# Altium PCB MIC24085 Breakout.PcbDoc
Units mil, origin at the board's own origin, x right, y up, seen from the top; angles counter-clockwise.
Board outline 1765 x 625 mil, 2 copper layers (Top Layer, Bottom Layer); 15 components, 8 nets, 45 pads, 36 vias.
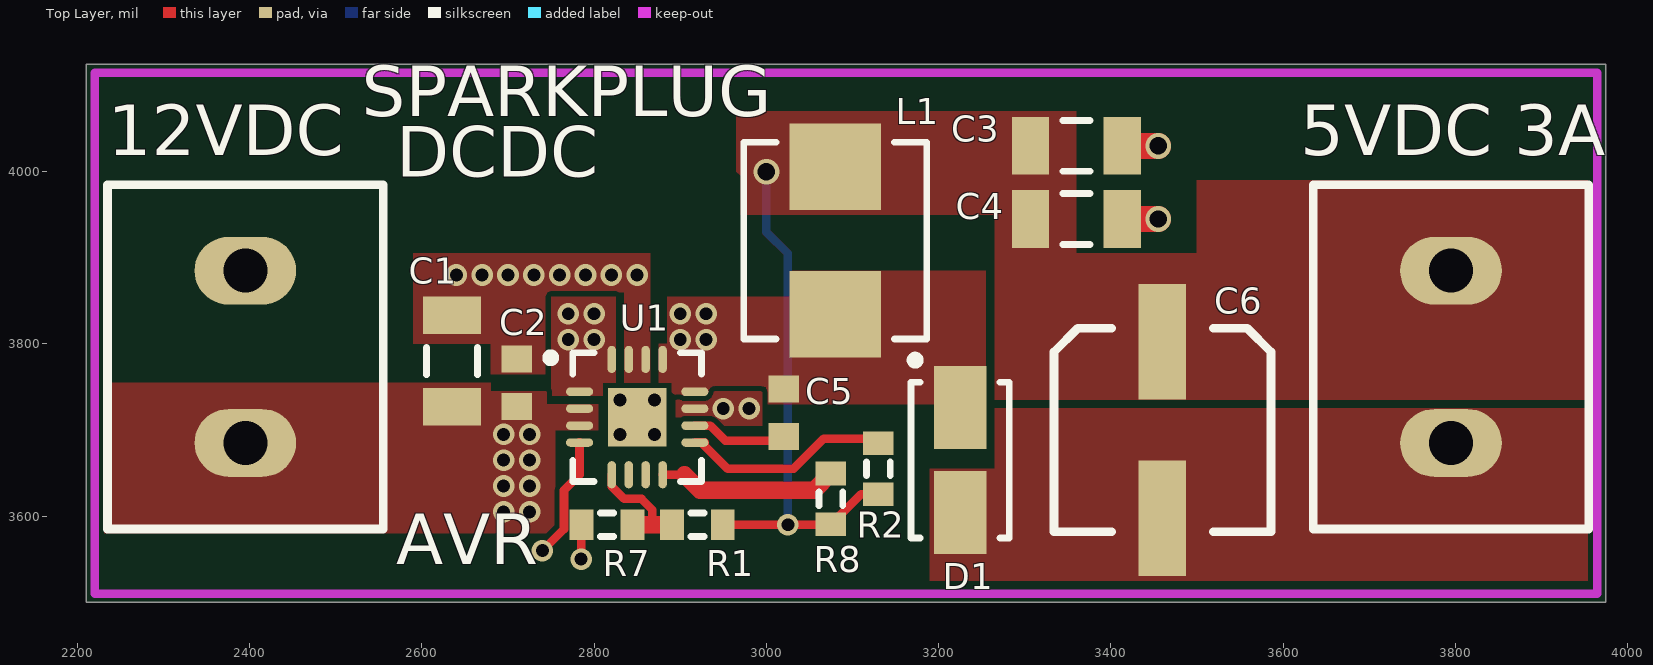
[diagram p0: Top Layer view]
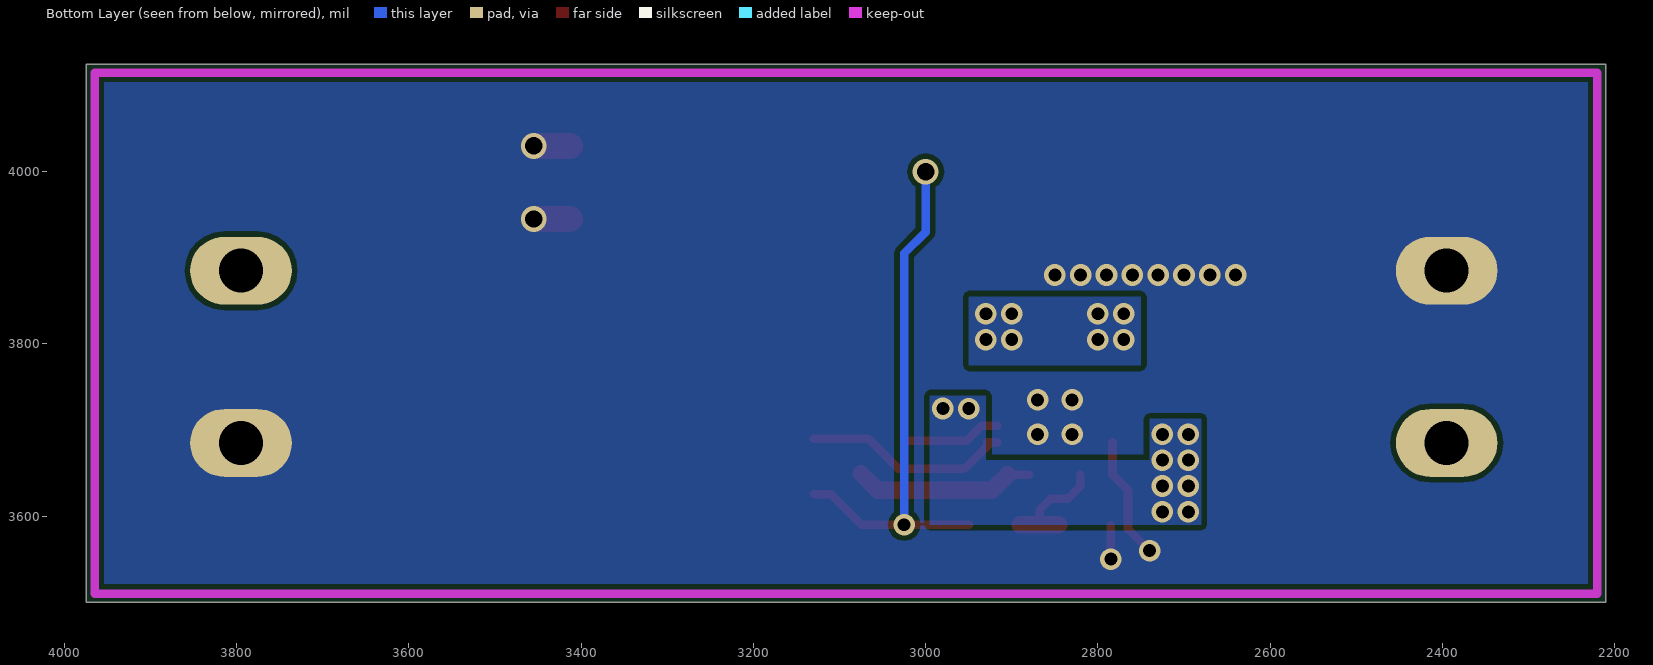
[diagram p1: Bottom Layer view, seen from below]

## Layer stack, top to bottom
Top Layer: signal copper 1.4
Dielectric: dielectric 12.6, FR-4, Dk 4.8
Bottom Layer: signal copper 1.4

## Board outline
2210,3500 2210,4125 3975,4125 3975,3500

## Design rules (kind name [scope] priority, off if disabled: settings)
Clearance [All] p1: gap=6
ComponentClearance [All] p1: gap=0 collisioncheckmode=3 verticalgap=10 showdistances=FALSE
FanoutControl Fanout_SOIC [(InComponent('U8') AND InComponent('U7'))] p3: bgadir=Out bgaviamode=Centered fanoutstyle=Staggered fanoutdirection=Alternating viagrid=1 // Fanout_SOIC (Default Rule)
FanoutControl Fanout_Small [All] p4: bgadir=Out bgaviamode=Centered fanoutstyle=Auto fanoutdirection=Alternating viagrid=1 // Fanout_Small (Default Rule)
HoleSize [All] p1: absolutevalues=TRUE maxlimit=120 minlimit=1 maxpercent=80.000 minpercent=20.000
MinimumSolderMaskSliver [All] p1 off: minsoldermaskwidth=10
MinimumSolderMaskSliver SilkscreenOverComponentPads [All] p2 off: minsoldermaskwidth=10
PlaneConnect [All] p1: planeconnectstyle=Direct reliefexpansion=20 reliefentries=4 reliefconductorwidth=10 reliefairgap=10
PolygonConnect PGND [InNet('GND')] p1: connectstyle=Direct reliefconductorwidth=10 reliefentries=4 polygonreliefangle="90 Angle" airgapwidth=10
PolygonConnect PolygonConnect_3 [InNet('5VCC')] p2: connectstyle=Direct reliefconductorwidth=10 reliefentries=4 polygonreliefangle="90 Angle" airgapwidth=10
PolygonConnect PolygonConnect_2 [InNet('SW')] p3: connectstyle=Direct reliefconductorwidth=10 reliefentries=4 polygonreliefangle="90 Angle" airgapwidth=10
PolygonConnect PolygonConnect_1 [InNet('VIN')] p4: connectstyle=Direct reliefconductorwidth=10 reliefentries=4 polygonreliefangle="90 Angle" airgapwidth=10
PolygonConnect [All] p5: connectstyle=Relief reliefconductorwidth=10 reliefentries=4 polygonreliefangle="90 Angle" airgapwidth=10
RoutingVias [All] p1: holewidth=15 width=25 viastyle="Through Hole" minholewidth=15 minwidth=25 maxholewidth=28 maxwidth=50
SilkToSilkClearance [All] p1 off: silktosilkclearance=10
SolderMaskExpansion [All] p1: expansion=4
Width [All] p1: maxlimit=30 minlimit=6 preferedwidth=6 minimp=50.000000 maximp=50.000000 favimp=50.000000
21 further rules are at their usual default settings.

## Components (designator, comment, footprint, x,y, rotation, side; value= is the part's Value field where it differs from the comment)
"5VDC 3A" "Pheonix Contact" CON-PHEONIX-508-Alt 3795,3885 r270 top (schematic designator "5v Out")
12VDC "Pheonix Contact" CON-PHEONIX-508-Alt 2395,3685 r90 top (schematic designator "12v Input")
C1 "1206" C1206 2635,3780 r270 top
C2 "0603" 1608[0603] 2710,3755 r270 top
C3 "1206" C1206 3360,4030 r180 top
C4 "1206" C1206 3360,3945 r180 top
C5 "0603" 1608[0603] 3020,3720 r90 top
C6 "VS D" "Panasonic VS D" 3460,3700 r90 top
D1 "PMEG1030EH_EJ" "SK33A - SOD123" 3225,3665 r90 top
L1 "CIP0530LR3R3" CIP0530LR3R3 3080,3920 r90 top
R1 "0603" J1-0603 2920,3590 r0 top
R2 "0603" J1-0603 3130,3655 r90 top
R7 "0603" J1-0603 2815,3590 r0 top
R8 "0603" J1-0603 3075,3620 r90 top
U1 "MIC24085" MIC24085-AYML 2850,3715 r0 top

## Footprints (in the part's own frame and the unit in brackets; to place one, negate y for a bottom-side part, rotate by r counter-clockwise, add the part's x,y. Pads: shape width x height; smd on the part's side, far side on the other; paste and mask are expansions set on the pad)
1608[0603] [mm] "Chip Capacitor, Body 1.6x0.8mm, IPC High Density"
  rect 0.8x0.9 smd: 1(-0.7,0) 2(0.7,0)
  body extent -0.87,-0.48 0.87,0.48, height 1.3
C1206 [mm] "Chip Capacitor, Body 3.2x1.6mm, IPC High Density"
  rect 1.1x1.7 smd: 1(-1.35,0) 2(1.35,0)
  silkscreen extent -0.4,-0.75 0.4,0.75, body extent -1.7,-0.9 1.7,0.9, height 1.3
CIP0530LR3R3 [mm] "Precision Wire Wound Inductor, 2-Leads, Body 5.58x5.30mm, IPC Medium Density"
  rect 2.55x2.7 smd: 1(-2.175,0) 2(2.175,0)
  silkscreen extent -2.9,-2.7 2.9,2.7, body extent -2.88,-2.7 2.88,2.7, height 2.29
CON-PHEONIX-508-Alt [mm]
  oval 2x3 hole 1.3: 1(0,0) 2(5.08,0)
  silkscreen extent -2.54,-4.06 7.62,4.06
J1-0603 [mm] "Chip Resistor, Body 1.6x0.8mm, IPC High Density"
  rect 0.7x0.9 smd: 1(-0.75,0) 2(0.75,0)
  silkscreen extent -0.2,-0.35 0.2,0.35, body extent -0.85,-0.48 0.85,0.48, height 0.9
MIC24085-AYML [mm] "QFN, 16-Leads, Body 3.25x3.25mm, Pitch 0.50mm, Thermal Pad 1.73x1.73mm, IPC Medium Density"
  oval 0.8x0.25 smd: 1(-1.7,0.75) 2(-1.7,0.25) 3(-1.7,-0.25) 4(-1.7,-0.75) 9(1.7,-0.75) 10(1.7,-0.25) 11(1.7,0.25) 12(1.7,0.75)
  oval 0.25x0.8 smd: 5(-0.75,-1.7) 6(-0.25,-1.7) 7(0.25,-1.7) 8(0.75,-1.7) 13(0.75,1.7) 14(0.25,1.7) 15(-0.25,1.7) 16(-0.75,1.7)
  rect 1.73x1.73 smd: 17(0,0)
  silkscreen extent -2.67,-1.9 1.9,1.9, body extent -1.75,-1.75 1.75,1.75, height 0.85
"Panasonic VS D" [mm]
  rect 3.4x1.4 smd: 1(2.6,0) 2(-2.6,0)
  silkscreen extent -3,-3.2 3,3.2
"SK33A - SOD123" [mm] "Molded Diode, 2-Leads, Body 4.30x2.70mm, IPC Medium Density"
  rect 2.45x1.55 smd: 1(-1.55,0) 2(1.55,0)
  silkscreen extent -2.3,-1.45 3.07,1.45, body extent -2.3,-1.45 2.3,1.45, height 2.44

## Part data
"5VDC 3A" 12VDC: library part "Pheonix Contact 2X1"
C1 C2 C3 C4 C5: library part "Cap Semi", "Capacitor (Semiconductor SIM Model)"
C6: library part "Cap Pol1", "Polarized Capacitor (Radial)"
D1: "Default Diode"
L1: library part Inductor, "Inductor"
R1 R2 R7 R8: library part Res3, "Resistor"

## Via types
v1: diameter 25, hole 15, Top Layer to Bottom Layer, tented both sides, 29 vias
v2: diameter 25, hole 15, Top Layer to Bottom Layer, 4 vias
v3: diameter 30, hole 20, Top Layer to Bottom Layer, tented both sides, 3 vias

## Nets (pads, with @x,y where several pads share a name; then routed paths per layer and width w, separated by ;. In a path a pad name is that pad's centre, name@x,y a point inside that pad or via, vN(x,y) a via of type N, cw(c..) or ccw(c..) an arc to the next point about the centre after c; other vN are vias at no path point)
5VCC: "5VDC 3A.1" C3.2 C4.2 C6.1 L1.2 R1.2 R2.1 R8.1 | length 614.9
  Top Layer w10: R1.2 v1(3025,3590) R8.1@3074.53,3590 ; R8.1 3110,3625.47 R2.1
  Bottom Layer w10: v3(3000,4000) 3000,3930 3025,3905 v1(3025,3590)
GND: 12VDC.2 "5VDC 3A.2" C1.1 C2.1 C3.1 C4.1 C6.2 D1.1 R7.1 U1.4 U1.14 U1.15 U1.17 | length 266.5
  Top Layer w10: v1(2740,3560) 2765,3585 2765,3630 2783.07,3648.07 U1.4 ; v1(2785,3550) R7.1@2785,3589.53
  Top Layer w30: C4.1 v3(3455,3945) ; C3.1 v3(3455,4030)
  other v1: 2640,3880 2670,3880 2700,3880 2730,3880 2760,3880 2790,3880 2820,3880 2850,3880
  other v2: 2830,3695 2870,3695 2830,3735 2870,3735
NetC5_1: C5.1 U1.10 | length 110.4
  Top Layer w10: U1.10 2934.84,3705.16 2952.56,3687.44 C5.1@3020,3687.44
NetR1_1: R1.1 R7.2 U1.5 | length 134.9
  Top Layer w10: U1.5 2820.47,3634.41 2834.89,3620 2855,3620 2867.74,3607.26 2867.74,3590
  Top Layer w20: R7.2@2845,3590 R1.1
NetR2_2: R2.2 U1.9 | length 244.3
  Top Layer w10: U1.9 U1.9@2924.53,3685.47 ; U1.9@2928.6,3685.47 U1.9@2924.53,3685.47 ; R2.2@3130,3690 3066.58,3690 3031.58,3655 2955,3655 U1.9@2924.53,3685.47
PG: R8.2 U1.8 | length 211
  Top Layer w10: U1.8 2905,3648.07
  Top Layer w20: 2905,3648.07 2923.07,3630 3055.47,3630 R8.2
SW: C5.2 D1.2 L1.1 U1.1 U1.12 U1.13 U1.16
  other v1: 2770,3805 2800,3805 2900,3805 2930,3805 2770,3835 2800,3835 2900,3835 2930,3835
VIN: 12VDC.1 C1.2 C2.2 U1.2 U1.3 U1.11
  other v1: 2695,3605 2725,3605 2695,3635 2725,3635 2695,3665 2725,3665 2695,3695 2725,3695 2950,3724.84 2980,3725
pads on no net: U1.6 U1.7

## Polygon pours and split planes (outlines as drawn)
GND on Bottom Layer "Mechanical 15-No Net" (solid, remove dead copper, pour order 20): 2210,4125 3975,4125 3975,3500 2210,3500
VIN on Bottom Layer "Mechanical 15-No Net" (solid, pour order 2): 2680,3713.21 2740,3713.21 2740,3665 2930,3665 2930,3740 2995,3740 2995,3590 2680,3590
SW on Bottom Layer "Mechanical 15-No Net" (solid, pour order 4): 2950,3775 2750,3775 2750,3855 2950,3855
VIN on Top Layer "Mechanical 15-No Net" (solid, pour order 6): 2805,3730 2805,3700 2755,3700 2755,3580 2230,3580 2230,3755 2680,3755 2680,3745 2745,3745 2745,3730
GND on Top Layer "Top Layer-No Net" (solid, remove dead copper, pour order 11): 3190,3525 3955,3525 3955,3725 3265,3725 3265,3655 3190,3655
SW on Top Layer "Mechanical 15-No Net" (solid, pour order 10): 2875,3740 2875,3800 2885,3800 2885,3855 3030,3855 3030,3885 3255,3885 3255,3730 3000,3730 3000,3750 2940,3750 2940,3740
5VCC on Top Layer "Mechanical 15-No Net" (solid, pour order 18): 2965,4070 2965,4000 2970,3995 2970,3950 3265,3950 3265,3735 3955,3735 3955,3990 3500,3990 3500,3905 3360,3905 3360,4070
VIN on Top Layer "Mechanical 15-No Net" (solid, remove dead copper, pour order 8): 2895,3735 2895,3715 2930,3715 2930,3705 2995,3705 2995,3745 2930,3745 2930,3735
SW on Top Layer "Mechanical 15-No Net" (solid, pour order 12): 2750,3740 2815,3740 2815,3755 2825,3755 2825,3855 2750,3855
GND on Top Layer "Mechanical 15-No Net" (solid, pour order 16): 2835,3755 2865,3755 2865,3905 2590,3905 2590,3800 2680,3800 2680,3765 2745,3765 2745,3860 2835,3860

## Keep-outs
Keep-Out Layer:
  lines w10: 2220,3510 2220,4115 3965,4115 3965,3510 2220,3510

## Silkscreen, mask and mechanical layers (free items; w line width, h text height)
Top Overlay:
  text "SPARKPLUG" at 2530,4045 h100
  text "DCDC" at 2570,3975 h100
  text "AVR" at 2570,3525 h100
Mechanical 15:
  the board outline again, w10